# Altium PCB ATmega32_ComServ.PcbDoc
Units mm, origin at the board's own origin, x right, y up, seen from the top; angles counter-clockwise.
Board outline 31.5 x 36.55 mm, 2 copper layers (Top, Bottom), stack 1.57 mm thick; 46 components, 37 nets, 194 pads, 19 vias.
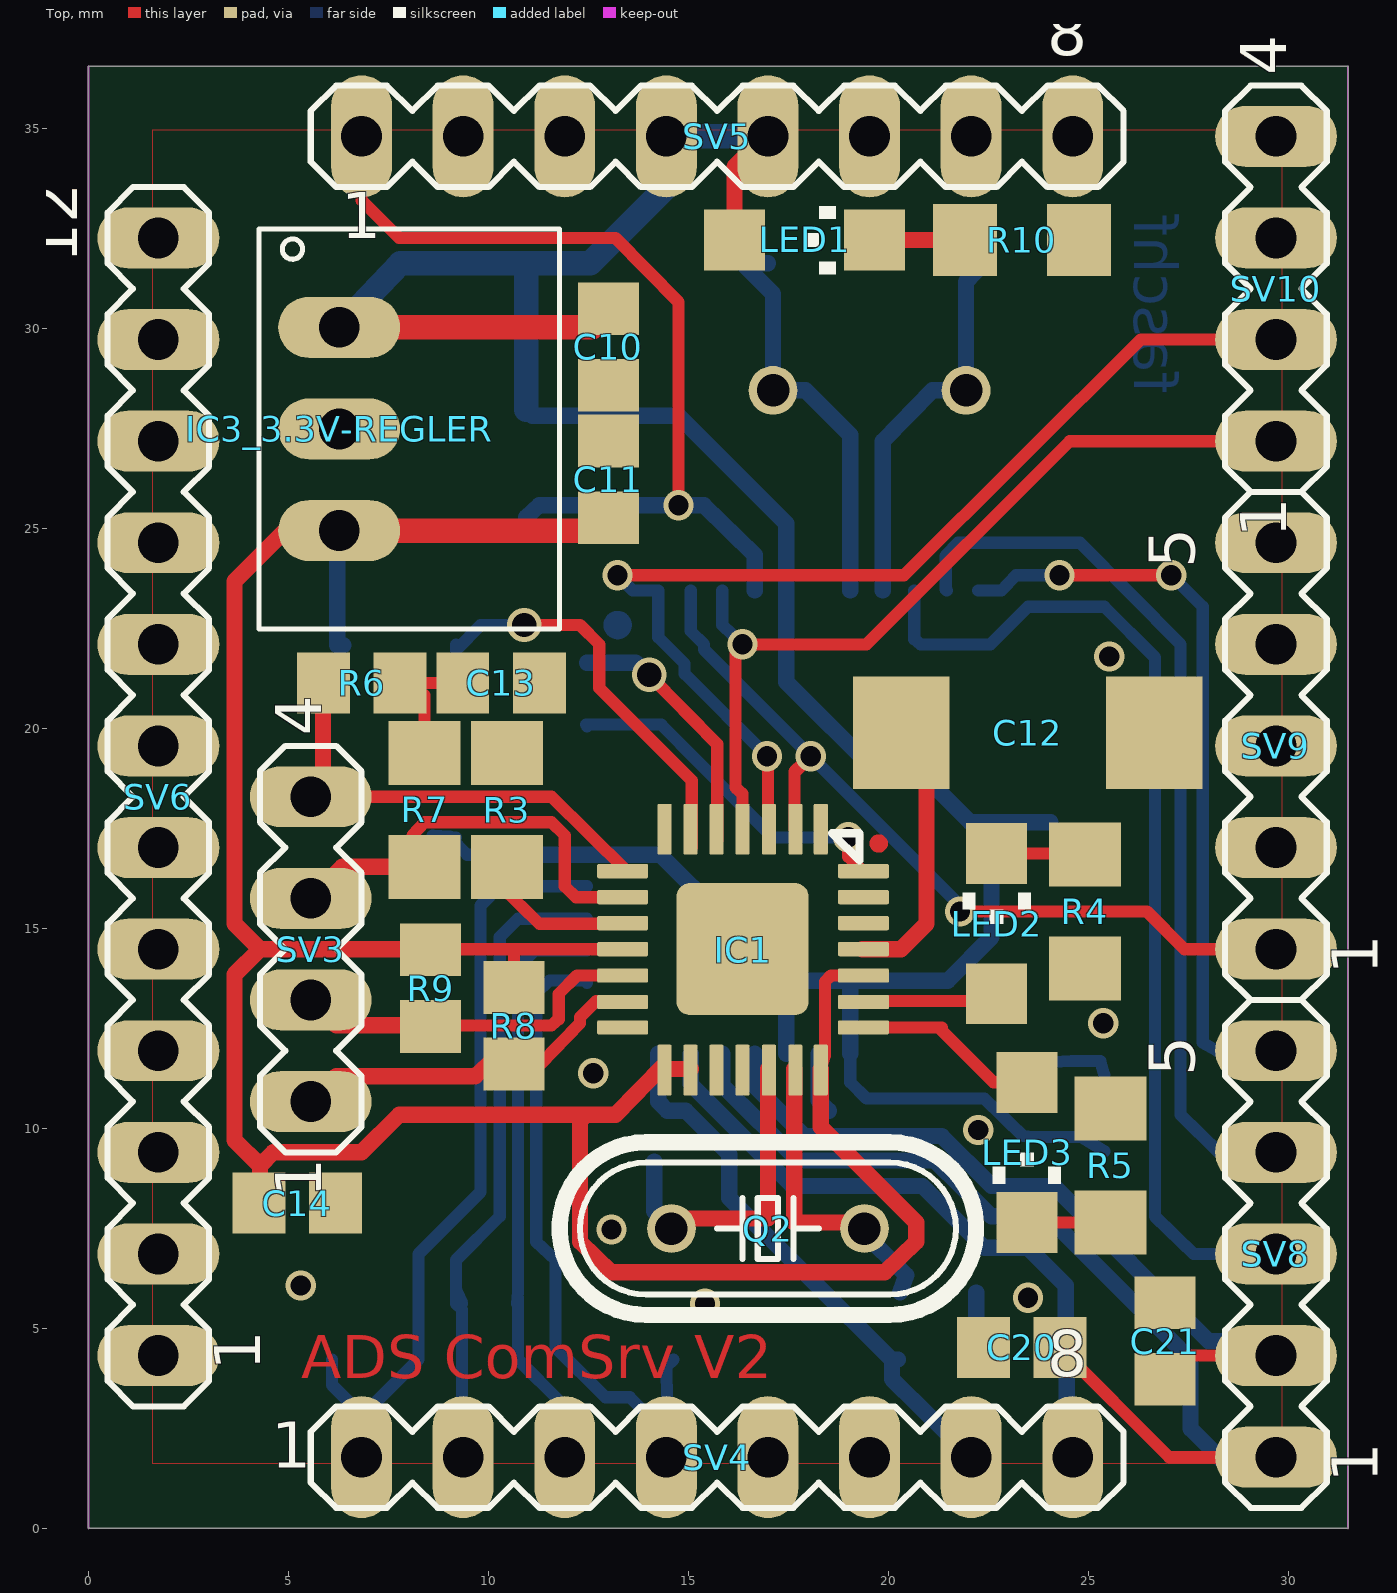
[diagram p0: Top view]
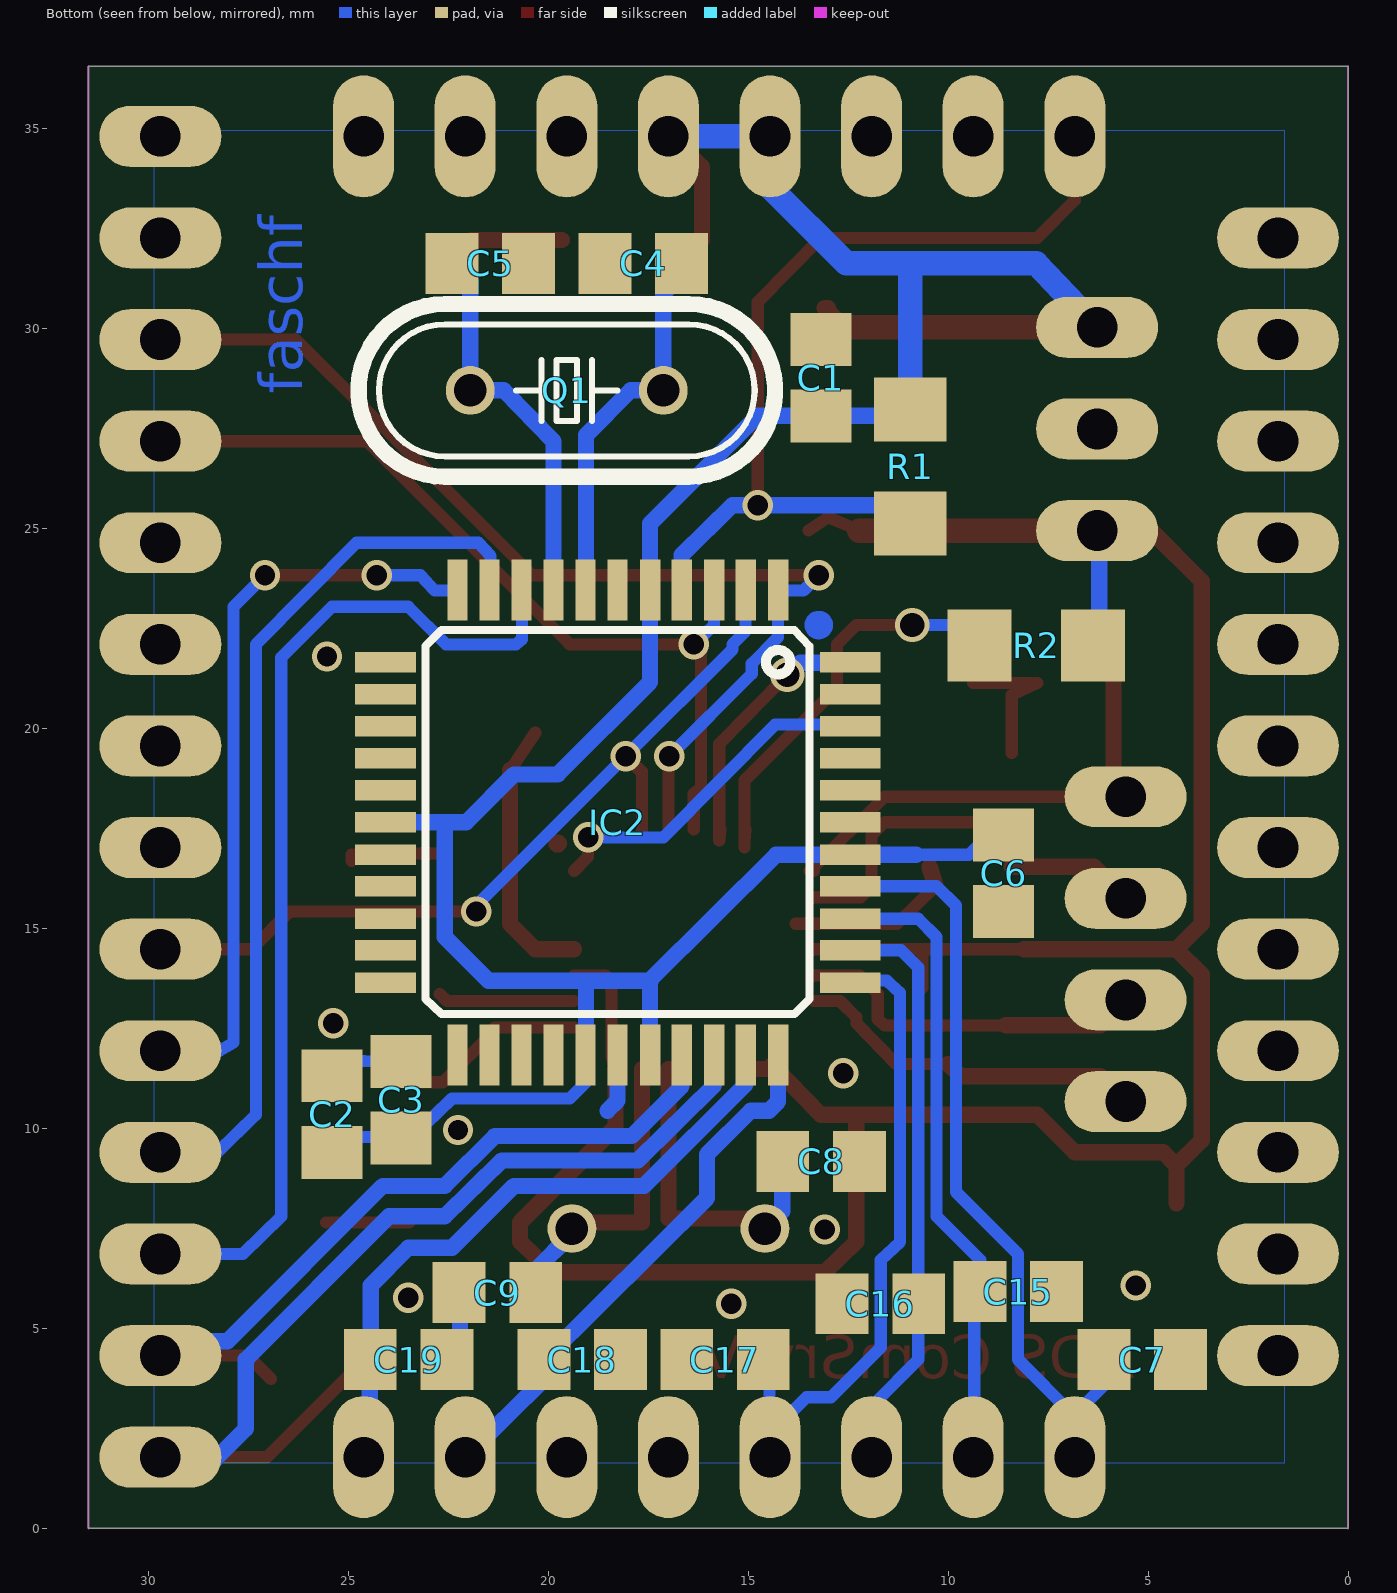
[diagram p1: Bottom view, seen from below]

## Layer stack, top to bottom
Top Solder: solder mask 0.0102, Solder Resist, Dk 3.5
Top: signal copper 0.035
Dielectric 1: core 1.5, FR-4, Dk 4.8
Bottom: signal copper 0.035
Bottom Solder: solder mask 0.0102, Solder Resist, Dk 3.5

## Board outline
0,0 31.496,0 31.496,36.551 0,36.551

## Design rules (kind name [scope] priority, off if disabled: settings)
Clearance mdViaVia [IsVia vs IsVia] p1: gap=0.125
Clearance mdPadVia [IsPad vs IsVia] p2: gap=0.125
Clearance mdPadPad [IsPad vs IsPad] p3: gap=0.125
Clearance mdWireVia [(InLayerClass('Signal Layers') AND IsTrack) vs IsVia] p4: gap=0.125
Clearance mdWirePad [(InLayerClass('Signal Layers') AND IsTrack) vs IsPad] p5: gap=0.125
Clearance mdWireWire [(InLayerClass('Signal Layers') AND IsTrack) vs (InLayerClass('Signal Layers') AND IsTrack)] p6: gap=0.125
Clearance [All] p7: gap=0.125
HoleSize [All] p1: absolutevalues=TRUE maxlimit=2540 minlimit=0.2 maxpercent=80.000 minpercent=20.000
HoleToHoleClearance [All] p1: gap=0.2 allowstackedmicrovias=TRUE
PolygonConnect ThermalVias [IsVia] p1: connectstyle=Direct reliefconductorwidth=0.254 reliefentries=4 polygonreliefangle="90 Angle" airgapwidth=0.254
PolygonConnect [All] p2: connectstyle=Relief reliefconductorwidth=0.254 reliefentries=4 polygonreliefangle="90 Angle" airgapwidth=0.254
RoutingVias [All] p1: holewidth=0.711 width=1.27 viastyle="Through Hole" minholewidth=0.711 minwidth=1.27 maxholewidth=0.711 maxwidth=1.27
SilkToSilkClearance [All] p1 off: silktosilkclearance=0.254
SilkToSolderMaskClearance [IsPad] p1 off: minsilkscreentomaskgap=0.254 clearancetoexposedcopper=TRUE
SolderMaskExpansion [All] p1: expansion=0.075
UnpouredPolygon [All] p1: allowunpoured=FALSE
Width [All] p1: maxlimit=2540 minlimit=0.125 preferedwidth=0.254
25 further rules are at their usual default settings.

## Components (designator, comment, footprint, x,y, rotation, side; value= is the part's Value field where it differs from the comment)
C1 "100n" C0805 13.183,28.753 r90 bottom
C2 "100n" C0805 25.4,10.363 r270 bottom
C3 "100n" C0805 23.673,10.719 r270 bottom
C4 "22p" C0805 17.628,31.623 r180 bottom
C5 "22p" C0805 21.438,31.623 r0 bottom
C6 "100n" C0805 8.611,16.383 r270 bottom
C7 "10n" C0805 5.156,4.216 r180 bottom
C8 "22p" C0805 13.183,9.169 r180 bottom
C9 "22p" C0805 21.26,5.893 r0 bottom
C10 "100n" C0805 13.005,29.54 r270 top
C11 "100n" C0805 13.005,26.213 r90 top
C12 "10u" SMC_D 23.47,19.888 r0 top
C13 "10n" C0805 10.312,21.133 r0 top
C14 "10n" C0805 5.232,8.128 r180 top
C15 "10n" C0805 8.255,5.918 r180 bottom
C16 "10n" C0805 11.684,5.613 r0 bottom
C17 "10n" C0805 15.57,4.216 r0 bottom
C18 "10n" C0805 19.152,4.216 r180 bottom
C19 "10n" C0805 23.495,4.216 r180 bottom
C20 "10n" C0805 23.343,4.521 r180 top
C21 "10n" C0805 26.924,4.674 r90 top
IC1 "ENC28J60QFN28_LONG_28" QFN28_LONG_ERRLES 16.358,14.478 r270 top
IC2 "MEGA32-A" TQFP44 18.263,17.653 r270 bottom
IC3_3.3V-REGLER "78RECOM" RECOM_3POL 6.274,27.483 r270 top
LED1 "" CHIPLED_1206 17.907,32.207 r270 top
LED2 "" CHIPLED_1206 22.708,15.113 r0 top
LED3 "" CHIPLED_1206 23.47,9.398 r180 top
Q1 "16MHz" HC49/S 19.533,28.448 r180 bottom
Q2 "25MHz" HC49/S 16.993,7.493 r0 top
R1 "10k" R1206 10.947,26.543 r90 bottom
R2 "10k" R1206 7.798,22.073 r180 bottom
R3 "2k2" R1206 10.465,17.958 r270 top
R4 "220R" R1206 24.917,15.418 r90 top
R5 "220R" R1206 25.552,9.068 r270 top
R6 "51R" R0805 6.833,21.133 r0 top
R7 "51R" R1206 8.407,17.958 r90 top
R8 "51R" R0805 10.643,12.573 r270 top
R9 "51R" R0805 8.56,13.513 r270 top
R10 "220R" R1206 23.343,32.207 r0 top
SV3 "" MA04-1 5.563,14.478 r90 top
SV4 "" MA08-1 15.723,1.778 r0 top
SV5 "" MA08-1 15.723,34.798 r0 top
SV6 "" MA12-1 1.753,18.288 r90 top
SV8 "" MA05-1 29.693,6.858 r90 top
SV9 "" MA05-1 29.693,19.558 r90 top
SV10 "" MA04-1 29.693,30.988 r90 top

## Footprints (in the part's own frame and the unit in brackets; to place one, negate y for a bottom-side part, rotate by r counter-clockwise, add the part's x,y. Pads: shape width x height; smd on the part's side, far side on the other; paste and mask are expansions set on the pad)
C0805 [mil] "C0805"
  rect 52x60 smd: 1(-37.4,0) 2(38,0)
CHIPLED_1206 [mil] "CHIPLED_1206"
  rect 60x60 smd: A(0,-68.9) C(0,69)
  silkscreen extent -33,0 34,31
HC49/S [mil] "HC49/S"
  round 48 hole 32: 1(-95,0) 2(95,0)
  silkscreen extent -205,-85 205,85
MA04-1 [mil] "MA04-1"
  oval 60x120 hole 40: 1(-150,0) 2(-50,0) 3(50,0) 4(150,0)
  silkscreen extent -200,-50 200,50
MA05-1 [mil] "MA05-1"
  oval 60x120 hole 40: 1(-200,0) 2(-100,0) 3(0,0) 4(100,0) 5(200,0)
  silkscreen extent -250,-50 250,50
MA08-1 [mil] "MA08-1"
  oval 60x120 hole 40: 1(-350,0) 2(-250,0) 3(-150,0) 4(-50,0) 5(50,0) 6(150,0) 7(250,0) 8(350,0)
  silkscreen extent -400,-50 400,50
MA12-1 [mil] "MA12-1"
  oval 60x120 hole 40: 1(-550,0) 2(-450,0) 3(-350,0) 4(-250,0) 5(-150,0) 6(-50,0) 7(50,0) 8(150,0) 9(250,0) 10(350,0) 11(450,0) 12(550,0)
  silkscreen extent -600,-50 600,50
QFN28_LONG_ERRLES [mil] "QFN28_LONG_ERRLES"
  rrect20% 50x14 smd: 1(-118.11,77) 2(-118.11,52) 3(-118.11,26) 4(-118.11,0) 5(-118.11,-25.59) 6(-118.11,-51.18) 7(-118.11,-76.77) 15(119,-76.77) 16(119,-51.18) 17(119,-25.59) 18(119,0) 19(119,26) 20(119,52) 21(119,77)
  rrect20% 14x50 smd: 8(-76.77,-118.11) 9(-51.18,-118.11) 10(-25.59,-118.11) 11(0,-118.11) 12(26,-118.11) 13(52,-118.11) 14(77,-118.11) 22(77,119) 23(52,119) 24(26,119) 25(0,119) 26(-25.59,119) 27(-51.18,119) 28(-76.77,119)
  rrect20% 130x130 smd: EXP(0,0)
  silkscreen extent -114,88 -87,115
R0805 [mil] "R0805"
  rect 52x60 smd: 1(-37.4,0) 2(38,0)
R1206 [mil] "R1206"
  rect 63x71 smd: 1(-55.98,0) 2(56,0)
RECOM_3POL [mil] "RECOM_3POL"
  oval 60x120 hole 40: 1(-100,0) 2(0,0) 3(100,0)
  silkscreen extent -197,-79 197,217
SMC_D [mil] "SMC_D"
  rect 95x111 smd: +(-124.02,0) -(125,0)
TQFP44 [mil] "TQFP44"
  rect 60x20 smd: 1(-228.35,158) 2(-228.35,126) 3(-228.35,95) 4(-228.35,63) 5(-228.35,32) 6(-228.35,0) 7(-228.35,-31.5) 8(-228.35,-62.99) 9(-228.35,-94.49) 10(-228.35,-125.98) 11(-228.35,-157.48) 23(229,-157.48) 24(229,-125.98) 25(229,-94.49) 26(229,-62.99) 27(229,-31.5) 28(229,0) 29(229,32) 30(229,63) 31(229,95) 32(229,126) 33(229,158)
  rect 20x60 smd: 12(-157.48,-228.35) 13(-125.98,-228.35) 14(-94.49,-228.35) 15(-62.99,-228.35) 16(-31.5,-228.35) 17(0,-228.35) 18(32,-228.35) 19(63,-228.35) 20(95,-228.35) 21(126,-228.35) 22(158,-228.35) 34(158,229) 35(126,229) 36(95,229) 37(63,229) 38(32,229) 39(0,229) 40(-31.5,229) 41(-62.99,229) 42(-94.49,229) 43(-125.98,229) 44(-157.48,229)
  silkscreen extent -189,-189 189,189

## Part data
C1 C2 C3 C4 C5 C6 C7 C8 C9 C10 C11 C13 C14 C15 C16 C17 C18 C19 C20 C21: library part C0805
C12: library part SMC_D
IC1: library part QFN28_LONG_ERRLES
IC2: library part TQFP44
IC3_3.3V-REGLER: library part RECOM_3POL
LED1 LED2 LED3: library part CHIPLED_1206
Q1 Q2: library part HC49/S
R1 R2 R3 R4 R5 R7 R10: library part R1206
R6 R8 R9: library part R0805
SV3 SV10: library part MA04-1
SV4 SV5: library part MA08-1
SV6: library part MA12-1
SV8 SV9: library part MA05-1

## Via types
v1: diameter 0.758/0.758 (per signal layer), hole 0.508, Top to Bottom, 17 vias
v2: diameter 0.86/0.86 (per signal layer), hole 0.61, Top to Bottom, 2 vias

## Nets (pads, with @x,y where several pads share a name; then routed paths per layer and width w, separated by ;. In a path a pad name is that pad's centre, name@x,y a point inside that pad or via, vN(x,y) a via of type N, cw(c..) or ccw(c..) an arc to the next point about the centre after c; other vN are vias at no path point)
1_TD+: IC1.13 R8.2 SV3.1 | length 8.9
  Top w0.305: R8.2@10.008,11.608 R8.2 11.303,11.608 12.294,12.624 12.294,12.776 12.7,13.183 IC1.13@13.36,13.183
  Top w0.406: SV3.1 6.198,11.303 9.677,11.303 R8.2@10.008,11.608
2_TD-: IC1.12 R9.2 SV3.2 | length 9.9
  Top w0.305: R9.2@8.56,12.573 8.103,12.573 11.582,12.573 11.76,12.725 11.76,13.36 12.217,13.818 IC1.12@13.36,13.818
  Top w0.406: SV3.2 6.198,12.573 R9.2@8.56,12.573
3_RD+: IC1.9 R7.1 SV3.3 | length 10.9
  Top w0.305: R7.1 8.103,17.323 8.407,17.653 11.582,17.653 11.913,17.323 11.913,16.053 12.192,15.773 IC1.9@13.36,15.773
  Top w0.406: SV3.3 6.35,16.535 R7.1
6_RD-: IC1.8 R6.1 SV3.4 | length 11.7
  Top w0.305: SV3.4 11.582,18.288 13.462,16.434 IC1.8@13.36,16.434
  Top w0.406: SV3.4 5.867,18.593 R6.1@5.867,21.133
ADC0: C7.1 IC2.37 SV4.1 | length 19.6
  Bottom w0.305: C7.1@6.096,4.216 6.096,3.581 SV4.1@6.858,2.819 ; SV4.1 6.858,1.803 SV4.1@6.858,2.819 ; IC2.37@12.471,16.053 10.287,16.053 9.804,15.57 9.804,8.407 8.255,6.858 8.255,4.216 SV4.1@6.858,2.819
ADC1: C15.1 IC2.36 SV4.2 | length 16.6
  Bottom w0.305: SV4.2@9.347,1.727 SV4.2@9.347,1.753 ; C15.1@9.347,5.613 9.22,5.918 C15.1@9.195,5.613 ; SV4.2 SV4.2@9.347,1.753 ; IC2.36@12.471,15.24 10.744,15.24 10.287,14.783 10.287,7.798 9.195,6.706 C15.1@9.195,5.613 ; C15.1@9.195,5.613 9.347,5.461 SV4.2@9.347,1.753
ADC2: C16.1 IC2.35 SV4.3 | length 14.8
  Bottom w0.305: C16.1@10.744,5.766 C16.1@10.744,5.613 ; SV4.3 11.836,1.854 11.836,3.124 10.744,4.216 C16.1@10.744,5.613 ; IC2.35@12.471,14.453 11.176,14.453 10.744,14.021 10.744,5.918 10.719,5.613 C16.1@10.744,5.613
ADC3: C17.1 IC2.34 SV4.4 | length 16.7
  Bottom w0.305: IC2.34@12.471,13.64 12.471,13.691 12.446,13.691 11.532,13.691 11.201,13.386 11.201,7.163 11.684,6.706 11.684,4.521 12.929,3.277 13.538,3.277 SV4.4@14.478,2.337 ; SV4.4 14.478,1.803 SV4.4@14.478,2.337 ; C17.1@14.63,4.216 14.453,4.039 SV4.4@14.478,2.337
ADC4: C18.1 IC2.33 SV4.7 | length 13.8
  Bottom w0.406: IC2.33@14.249,11.862 14.249,10.668 14.478,10.439 14.935,10.439 16.027,9.347 16.027,8.255 C18.1@20.091,4.216 ; C18.1@20.244,4.216 C18.1@20.091,4.216 ; SV4.7 20.091,3.734 C18.1@20.091,4.216
ADC5: C19.1 IC2.32 SV4.8 | length 16.6
  Bottom w0.406: IC2.32@15.062,11.862 15.062,11.1 17.602,8.56 20.853,8.56 22.403,7.01 23.495,7.01 24.435,6.071 24.435,4.242 24.46,4.216 24.46,1.93 SV4.8
ADC6: C20.1 IC2.31 SV8.1 | length 26.1
  Top w0.305: C20.1@24.282,4.521 27.026,1.778 SV8.1
  Top w0.406: C20.1@24.282,4.521 C20.1@24.308,4.521
  Bottom w0.406: IC2.31@15.85,11.862 15.85,11.074 17.755,9.195 21.158,9.195 22.581,7.798 23.978,7.798 27.559,4.216 27.559,2.489 28.321,1.727 29.642,1.727 SV8.1
ADC7: C21.1 IC2.30 SV8.2 | length 19.6
  Top w0.305: C21.1@26.924,3.734 27.508,4.318 SV8.2
  Bottom w0.406: IC2.30@16.662,11.862 16.662,11.049 17.907,9.804 21.336,9.804 22.581,8.56 24.13,8.56 28.016,4.674 29.312,4.674 SV8.2
GND: C1.2 C2.1 C3.1 C4.1 C5.1 C6.2 C7.2 C8.2 C9.2 C10.2 C11.2 C12.- C13.2 C14.1 C15.2 C16.2 C17.2 C18.2 C19.2 C20.2 C21.2 IC1.7 IC1.14 IC1.17 IC1.18 IC1.26 IC2.6 IC2.18 IC2.28 IC2.39 IC3_3.3V-REGLER.2 R3.1 R4.1 R5.1 R10.2 SV5.2 SV5.3 SV5.6 | length 5.7
  Bottom w0.305: C3.1@23.673,11.659 24.105,11.659 24.587,11.684 25.298,11.684 C2.1@25.4,11.328
  Bottom w0.406: IC2.28@18.263,11.862 18.263,10.693 18.517,10.439 ; C9.2@22.2,5.893 22.2,4.42 22.581,4.064 C19.2@22.555,4.216
  other v1: 15.418,5.613 23.495,5.766 5.309,6.071 13.081,7.468 22.25,9.957 12.624,11.379 25.375,12.624 25.527,21.793
INT0: IC2.11 SV8.5 | length 18.9
  Top w0.305: v1(24.282,23.825) v1(27.076,23.825)
  Bottom w0.305: IC2.11@22.25,23.444 22.835,23.444 23.19,23.825 v1(24.282,23.825) ; v1(27.076,23.825) 27.864,23.038 27.864,12.141 28.219,11.938 SV8.5
MISO: IC1.2 IC2.2 SV9.1 | length 23.1
  Top w0.305: v1(21.793,15.418) 26.467,15.418 27.407,14.478 SV9.1 ; IC1.2@17.653,17.475 17.653,18.898 v1(18.059,19.304) 17.653,18.923 IC1.2@17.653,17.475
  Bottom w0.305: IC2.2@15.062,23.444 15.062,22.428 15.392,22.098 15.392,21.971 v1(18.059,19.304) 21.793,15.57 v1(21.793,15.418)
MOSI: IC1.3 IC2.1 SV10.2 | length 27.2
  Top w0.305: v1(13.233,23.825) 20.396,23.825 26.314,29.718 29.667,29.718 SV10.2 ; v1(16.967,19.304) 16.993,19.126 IC1.3@16.993,17.475
  Bottom w0.305: v1(13.233,23.825) 13.614,23.444 14.249,23.444 14.249,22.276 14.91,21.615 14.91,21.361 v1(16.967,19.304)
N$1: C5.2 IC2.8 Q1.1 | length 9.7
  Bottom w0.406: IC2.8@19.863,23.444 19.863,27.178 21.107,28.448 Q1.1 21.946,31.166 C5.2@22.377,31.623
N$2: C4.2 IC2.7 Q1.2 | length 10.7
  Bottom w0.305: C4.2@16.358,31.598 16.383,31.623 C4.2
  Bottom w0.406: C4.2@16.993,31.623 C4.2 16.358,31.623 17.12,30.861 Q1.2 17.932,28.448 19.05,27.33 IC2.7@19.05,23.444
N$3: LED1.C R10.1 | length 2.3
  Top w0.406: LED1.C R10.1
N$4: C8.1 IC1.19 Q2.1 | length 8.2
  Top w0.406: Q2.1 14.58,7.468 14.63,7.468 14.884,7.747 16.993,7.747 IC1.19@16.993,11.481
  Bottom w0.406: C8.1@14.148,9.169 14.148,7.925 Q2.1
N$5: C9.1 IC1.20 Q2.2 | length 7.8
  Top w0.406: IC1.20@17.653,11.481 17.653,7.645 19.253,7.645 Q2.2
  Bottom w0.305: Q2.2@19.304,7.468 19.38,7.468 Q2.2
  Bottom w0.406: Q2.2@19.304,7.468 20.447,6.325 C9.1@20.295,5.893
N$6: C12.+ IC1.25 | length 6.8
  Top w0.305: C12.+ C12.+@20.955,18.948
  Top w0.406: IC1.25@19.355,14.478 20.32,14.478 20.955,15.113 C12.+@20.955,18.948
N$11: IC1.28 IC2.42 | length 8.8
  Top w0.305: v1(18.999,17.272) 18.999,16.789 IC1.28@19.355,16.434
  Bottom w0.305: IC2.42@12.471,20.041 12.471,20.091 12.446,20.091 14.326,20.091 17.12,17.272 v1(18.999,17.272)
N$12: IC1.6 R2.1 | length 10.7
  Top w0.305: v2(10.897,22.581) 12.294,22.581 12.776,22.098 12.776,21.006 15.088,18.694 IC1.6@15.088,17.145 ; IC1.6@15.062,17.475 IC1.6@15.088,17.145 ; IC1.6@15.088,17.018 IC1.6@15.088,17.145
  Bottom w0.305: R2.1@9.195,22.098 9.195,21.946 R2.1@9.22,21.971 ; R2.1 R2.1@9.22,21.971 ; v2(10.897,22.581) 9.804,22.581 R2.1@9.22,21.971
N$14: IC1.10 R3.2 | length 4.7
  Top w0.305: R3.2@10.312,16.053 11.278,15.113 IC1.10@13.716,15.113 ; IC1.10@13.36,15.113 13.691,15.113 IC1.10@13.716,15.113 ; IC1.10@13.818,15.113 IC1.10@13.716,15.113
  Top w0.406: R3.2@10.312,16.053 R3.2
N$19: LED2.C R4.2 | length 2.4
  Top w0.305: LED2.C 24.765,16.866 24.917,16.688 R4.2
N$20: IC1.23 LED2.A | length 3.4
  Top w0.305: IC1.23@19.355,13.183 22.53,13.183 LED2.A@22.708,13.36
N$21: IC1.22 LED3.A | length 4.7
  Top w0.305: IC1.22@19.355,12.522 21.336,12.522 21.336,12.446 22.631,11.151 LED3.A@23.47,11.151
N$22: LED3.C R5.2 | length 2.1
  Top w0.305: LED3.C 24.917,7.645 R5.2
N$23: C13.1 R6.2 R7.2 | length 3.8
  Top w0.305: R7.2 8.407,20.828 7.772,21.133 C13.1@9.373,21.133
RESET: IC2.4 R1.1 SV5.1 | length 23.2
  Top w0.305: SV5.1 6.833,33.198 7.772,32.258 13.183,32.258 14.757,30.658 v1(14.757,25.578)
  Bottom w0.406: R1.1@10.947,24.943 R1.1 10.947,25.273 11.278,25.578 v1(14.757,25.578) 15.392,25.578 16.662,24.333 IC2.4@16.662,23.444
RXD: IC2.9 SV8.3 | length 25.6
  Bottom w0.305: IC2.9@20.65,23.444 20.65,22.225 20.803,22.098 22.555,22.098 23.495,23.038 25.4,23.038 26.67,21.768 26.67,7.798 27.635,6.858 SV8.3
SCK: IC1.4 IC2.3 SV10.1 | length 21.8
  Top w0.305: IC1.4@16.358,17.475 16.358,18.364 16.18,18.517 16.18,21.92 v1(16.358,22.098) 19.456,22.098 24.536,27.178 SV10.1
  Bottom w0.305: IC2.3@15.85,23.444 15.85,22.581 v1(16.358,22.098)
SS: IC1.5 IC2.44 | length 6.8
  Top w0.305: v2(14.021,21.336) 15.723,19.609 15.723,17.196 IC1.5@15.697,17.475
  Bottom w0.406: IC2.44@12.471,21.641 13.691,21.641 v2(14.021,21.336)
TXD: IC2.10 SV8.4 | length 22.5
  Bottom w0.305: IC2.10@21.463,23.444 21.438,23.47 21.438,24.308 21.742,24.638 24.79,24.638 27.305,22.098 27.305,10.338 28.27,9.398 SV8.4
VCC_3V: C11.1 C14.2 IC1.11 IC1.15 IC1.16 IC1.21 IC1.24 IC3_3.3V-REGLER.3 R2.2 R8.1 R9.1 | length 73.1
  Top w0.305: R9.1@8.56,14.478 8.103,14.478 10.643,14.478 ; R8.1@10.643,13.513 10.643,14.478 ; 12.217,24.943 13.005,25.273 C11.1@13.487,24.943 ; IC1.11@13.36,14.478 10.643,14.478 ; IC1.15@14.402,11.481 IC1.15@14.402,11.582 ; IC1.21@18.313,11.481 18.415,11.811 18.415,13.665 18.567,13.818 IC1.24@19.355,13.818
  Top w0.406: C14.2@4.293,8.128 4.293,9.068 ; IC3_3.3V-REGLER.3 4.928,24.943 3.658,23.673 3.658,15.113 4.293,14.478 ; R9.1@8.103,14.478 4.293,14.478 ; IC1.15@14.402,11.481 IC1.16@15.062,11.481 ; IC1.15@14.402,11.582 13.183,10.338 12.446,10.338 ; IC1.21@18.313,11.481 18.313,10.033 20.701,7.645 20.701,7.163 19.914,6.401 13.081,6.401 12.294,7.163 12.294,10.185 12.446,10.338 ; 4.293,9.068 4.623,9.398 6.833,9.398 7.772,10.338 12.446,10.338 ; 4.293,9.068 3.658,9.703 3.658,13.843 4.293,14.478
  Top w0.61: IC3_3.3V-REGLER.3 12.217,24.943
  Bottom w0.305: IC3_3.3V-REGLER.3@6.223,24.892 6.223,24.917 IC3_3.3V-REGLER.3
  Bottom w0.406: IC3_3.3V-REGLER.3@6.223,24.892 6.223,22.073 R2.2
VCC_5V: C1.1 C2.2 C3.2 C6.1 C10.1 IC2.5 IC2.17 IC2.27 IC2.29 IC2.38 IC3_3.3V-REGLER.1 LED1.A R1.2 SV5.4 SV5.5 | length 77.5
  Top w0.406: C10.1@12.598,30.023 13.081,30.505 C10.1@13.005,30.505 ; LED1.A@16.154,32.207 16.154,34.036 16.967,34.849 16.967,34.823 SV5.5
  Top w0.61: IC3_3.3V-REGLER.1 C10.1@12.598,30.023
  Bottom w0.305: C6.1@8.611,17.323 9.042,17.297 C6.1@9.042,17.272 ; C6.1@9.195,17.272 C6.1@9.042,17.272 ; 10.795,16.84 9.474,16.84 C6.1@9.042,17.272 ; IC2.27@19.05,11.862 19.05,11.151 19.456,10.744 22.403,10.744 23.368,9.804 23.673,9.779 24.841,9.779 C2.2@25.4,9.423 ; 22.403,17.653 22.479,17.602 22.581,17.602
  Bottom w0.406: 10.795,16.84 12.471,16.84 14.3,16.84 17.45,13.716 ; R1.2 11.1,27.813 13.183,27.813 14.757,27.813 17.45,25.121 17.45,23.444 17.45,21.158 19.761,18.847 20.853,18.847 22.047,17.653 22.403,17.653 IC2.17@24.054,17.653 ; IC2.29@17.45,11.862 17.45,13.691 17.45,13.716 ; IC2.27@19.05,11.862 19.05,13.614 19.152,13.691 ; 22.581,17.602 22.581,14.783 21.488,13.691 19.152,13.691 ; 17.45,13.716 17.424,13.691 19.152,13.691
  Bottom w0.61: IC3_3.3V-REGLER.1 7.798,31.623 10.947,31.623 ; R1.2 10.947,31.623 ; SV5.5 SV5.4 14.453,33.528 12.548,31.623 10.947,31.623
pads on no net: IC1.1 IC1.27 IC1.EXP IC2.12 IC2.13 IC2.14 IC2.15 IC2.16 IC2.19 IC2.20 IC2.21 IC2.22 IC2.23 IC2.24 IC2.25 IC2.26 IC2.40 IC2.41 IC2.43 SV4.5 SV4.6 SV5.7 SV5.8 SV6.1 SV6.2 SV6.3 SV6.4 SV6.5 SV6.6 SV6.7 SV6.8 SV6.9 SV6.10 SV6.11 SV6.12 SV9.2 SV9.3 SV9.4 SV9.5 SV10.3 SV10.4
copper on no net: | length 1.6
  Top w0.254: 19.863,17.12 ccw(c19.761,17.12) 19.863,17.12
  Bottom w0.406: 13.386,22.581 ccw(c13.233,22.581) 13.386,22.581

## Polygon pours and split planes (outlines as drawn)
GND on Bottom "Bottom-GND" (solid, remove dead copper, shelved, pour order 2): 29.845,1.626 29.845,34.95 1.6,34.95 1.6,1.626
GND on Top "Top-GND" (solid, remove dead copper, shelved, pour order 4): 1.6,1.626 29.845,1.626 29.845,34.95 1.6,34.95

## Keep-outs
Keep-Out Layer:
  lines w0.05: 0,0 0,36.551 ; 31.496,0 31.496,36.551

## Other copper
Top:
  text "ADS ComSrv V2" at 5.33,3.747 h1.08
Bottom:
  text "faschf" at 26.15,28.359 h1.08 r270

## Silkscreen, mask and mechanical layers (free items; w line width, h text height)
Dimension:
  lines w0.05: 0,0 0,36.551 ; 0,0 31.496,0 ; 0,0 31.496,0 ; 0,36.551 31.496,36.551 ; 0,36.551 31.496,36.551 ; 31.496,0 31.496,36.551

## Text inside footprints (layer, text, board x,y; h text height)
IC3_3.3V-REGLER: tDocu "3" at 5.639,25.578 h1.97 r270; tDocu "2" at 5.639,28.118 h1.97 r270; tDocu "1" at 5.639,30.658 h1.97 r270
SV3: Top Overlay "4" at 6.198,19.812 h1.97 r90; Top Overlay "1" at 6.198,8.255 h1.97 r90
SV4: Top Overlay "8" at 23.978,3.429 h1.97; Top Overlay "1" at 4.572,1.143 h1.97
SV5: Top Overlay "8" at 23.978,36.449 h1.97; Top Overlay "1" at 6.325,31.877 h1.97
SV6: Top Overlay "12" at 0.102,31.623 h1.97 r90; Top Overlay "1" at 4.674,3.937 h1.97 r90
SV8: Top Overlay "5" at 28.042,11.303 h1.97 r90; Top Overlay "1" at 32.614,1.143 h1.97 r90
SV9: Top Overlay "5" at 28.042,24.003 h1.97 r90; Top Overlay "1" at 32.614,13.843 h1.97 r90
SV10: Top Overlay "4" at 30.328,36.322 h1.97 r90; Top Overlay "1" at 30.328,24.765 h1.97 r90